# Altium PCB USB_Switch_Board.PcbDoc (part 2 of 2)
Units mm, origin at the board's own origin, x right, y up, seen from the top; angles counter-clockwise.
Board outline 83 x 30 mm, 2 copper layers (Top Layer, Bottom Layer), stack 1.554 mm thick; 73 components, 34 nets, 215 pads, 199 vias.
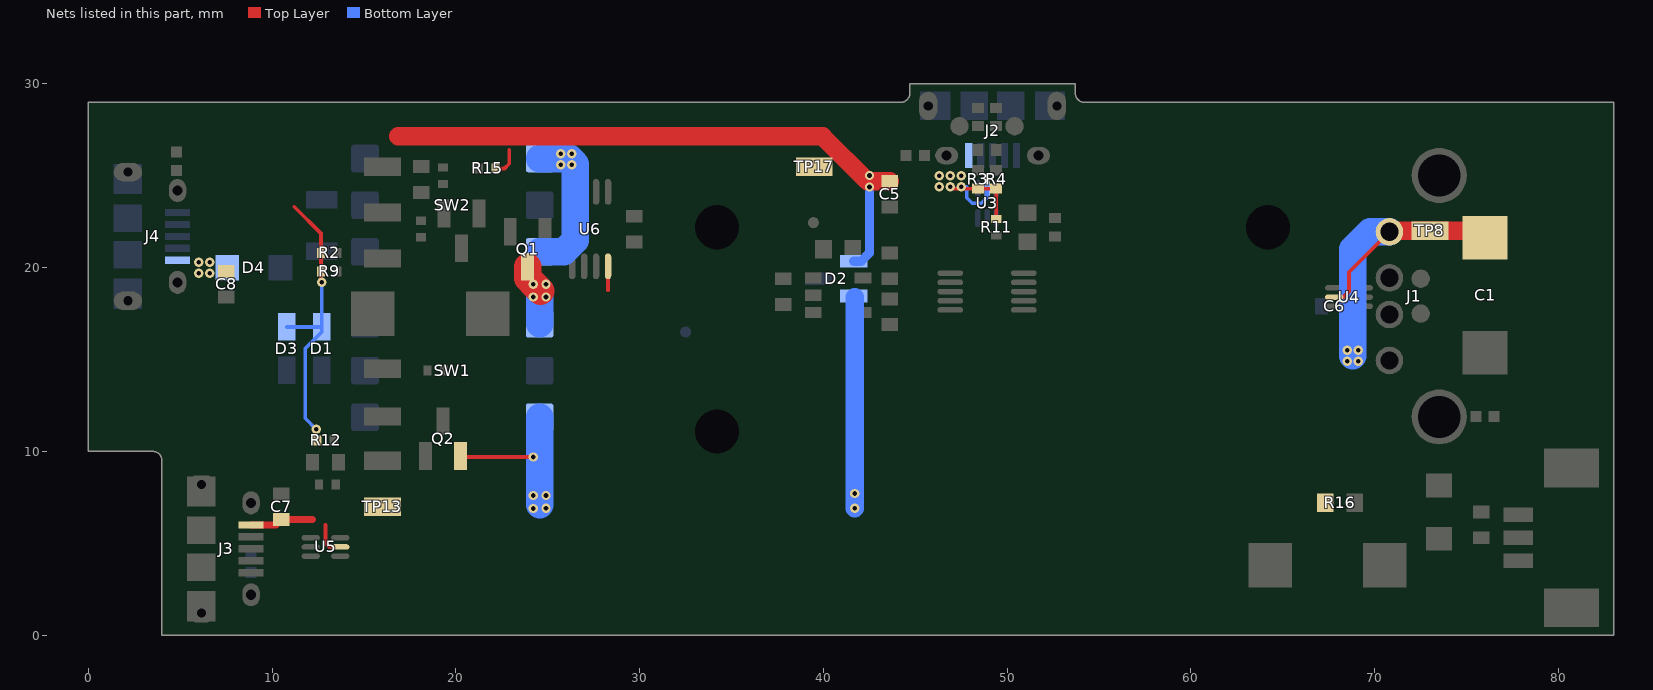
[diagram p2: the nets of this part, all layers, seen from the top]

## Via types
v1: diameter 0.508, hole 0.254, Top Layer to Bottom Layer, tented both sides, 199 vias

## Nets (pads, with @x,y where several pads share a name; then routed paths per layer and width w, separated by ;. In a path a pad name is that pad's centre, name@x,y a point inside that pad or via, vN(x,y) a via of type N, cw(c..) or ccw(c..) an arc to the next point about the centre after c; other vN are vias at no path point) (continued)
V_BUS: C5.1 C8.1 D1.1 D2.1 D3.1 D4.1 J2.1 J4.1 R2.1 R3.2 R4.2 R9.1 R11.2 R12.2 R15.1 SW2.4 SW2.6 TP17.1 U3.5 | length 65.5
  Top Layer w0.2: 11.2,23.315 12.65,21.865 R2.1@12.65,20.8 R9.1@12.65,19.8 12.65,19.1 12.7,19.15 v1(12.7,19.2) ; v1(12.4,11.2) 12.4,10.65 R12.2@12.45,10.6 ; R15.1@22.15,25.4 22.645,25.4 22.9,25.655 22.9,26.4 ; 47.15,24.3 R3.2@48.4,24.3 R4.2@49.4,24.3 R11.2@49.4,22.65
  Top Layer w1: 16.852,27.148 39.952,27.148 42.4,24.7 C5.1@43.6,24.7
  Bottom Layer w0.2: D3.1@10.8,16.775 D1.1@12.7,16.775 ; v1(12.4,11.2) 11.8,11.8 11.8,15.6 12.7,16.5 D1.1@12.7,16.775 ; v1(12.7,19.2) D1.1@12.7,16.775 ; 47.8,24.402 47.8,23.8 48.1,23.5 48.58,23.5 48.9,23.82 U3.5@48.9,24.305
  Bottom Layer w0.5: D2.1@41.65,20.35 42.05,20.35 42.5,20.8 v1(42.5,24.39) v1(42.5,25.013)
  Bottom Layer w1.5: SW2.6@24.55,20.86 25.86,20.86 26.5,21.5 26.5,25.64 26.2,25.94 SW2.4@24.55,25.94
  other v1: 6,19.7 6.6,19.7 6,20.3 6.6,20.3 46.3,24.4 46.9,24.4 47.5,24.4 46.3,25 46.9,25 47.5,25 25.7,25.6 26.3,25.6 25.7,26.2 26.3,26.2
V_IPad: C1.1 C6.1 J1.1 Q1.3 SW1.4 TP8.1 U4.5 U6.8 | length 22.9
  Top Layer w0.2: 28.275,18.788 U6.8@28.275,20.075 ; U4.5@67.795,18.4 68.3,18.4 68.6,18.7 68.6,19.75 J1.1@70.8,21.95
  Top Layer w1: J1.1@70.8,21.95 70.85,22 TP8.1@73,22 C1.1@75.62,22
  Top Layer w1.5: Q1.3@23.9,20.05 23.9,19.43 24.216,19.113 24.6,18.73
  Bottom Layer w1.5: SW1.4@24.55,16.94 24.55,18.79 ; 68.8,15.2 68.8,21 69.75,21.95 J1.1@70.8,21.95
  other v1: 68.5,14.9 69.1,14.9 68.5,15.5 69.1,15.5 24.2,18.4 24.9,18.4 24.2,19.097 24.9,19.097
V_RC_Data: C7.1 D2.2 J3.1 Q2.2 R16.1 SW1.6 TP13.1 U5.5 | length 28.6
  Top Layer w0.2: 12.9,6 12.9,5 13.1,4.8 U5.5@13.705,4.8 ; Q2.2@20.25,9.75 20.3,9.7 v1(24.2,9.7)
  Top Layer w0.4: J3.1@8.85,6 10.2,6 C7.1@10.5,6.3 12.175,6.3
  Bottom Layer w0.2: v1(24.2,9.7) 24.2,12.21 SW1.6@24.55,11.86
  Bottom Layer w0.5: D2.2@41.65,18.45 D2.2@41.7,18.4
  Bottom Layer w1: v1(41.7,6.909) v1(41.7,7.709) D2.2@41.7,18.4
  Bottom Layer w1.5: 24.55,7.1 SW1.6@24.55,11.86
  other v1: 24.2,6.892 24.9,6.909 24.2,7.6 24.9,7.6
pads on no net: F1.1 F2.1 J2.4 J3.4 J4.2 J4.3 J4.4 J5.1 SW1.3 SW1.5 SW2.3 U2.4 U6.3 U6.5

## Polygon pours and split planes (outlines as drawn)
GND on Top Layer "GND_L01_P021" (solid, pour order 21): 0,29 83,29 83,0 0,0
V_RC_Data on Top Layer "V_RC_DATA_L01_P017" (solid, remove dead copper, pour order 17): 12.7,8.3 11.1,6.7 10,6.7 9.5,6.2 9.5,5.8 17.2,5.8 17.6,6.2 67.631,6.2 68.004,6.569 68.004,7.896 67.6,8.3 36.5,8.3 35.7,7.5 32.7,7.5 31.9,8.3
V_IPad on Top Layer "V_IPAD_L01_P013" (solid, remove dead copper, pour order 13): 23.959,19 23.959,16.441 25.45,14.95 35.65,14.95 38.05,12.55 67.15,12.55 69.4,14.8 69.4,15.9 38.6,15.9 36.3,18.2 28.9,18.2 28.4,18.7 28.4,19
V_BUS on Top Layer "V_BUS_L01_P010" (solid, remove dead copper, pour order 10): 5.7,20.915 5.7,19.415 8.215,19.415 15,26.2 24.4,26.2 25.2,25.4 38.6,25.4 40.894,23.106 46.067,23.106 46.067,25.199 43.3,25.202 40.503,28 13.5,28 6.415,20.915
NetC9_1 on Top Layer "NETC9_1_L01_P019" (solid, remove dead copper, pour order 19): 68.4,7.7 68.975,8.275 70.725,8.275 72.6,6.4 74.28,6.4 74.6,6.08 74.6,4.242 72.458,2.1 69.182,2.1 68.4,2.882
GND on Bottom Layer "GND_L02_P023" (solid, pour order 23): 0,29 83,29 83,0 0,0

## Keep-outs
Top Layer:
  circle w0.1: c34.2,11.075 r3.5
  circle w0.1: c34.2,22.2 r3.5
  circle w0.1: c64.2,22.2 r3.5
Bottom Layer:
  circle w0.1: c34.2,11.075 r3.5
  circle w0.1: c34.2,22.2 r3.5
  circle w0.1: c64.2,22.2 r3.5

## Other copper
Top Layer:
  pour cut-out: 61.7,22.2 ccw(c64.2,22.2) 64.2,19.7 ccw(c64.2,22.2) 66.7,22.2 ccw(c64.2,22.2) 64.2,24.7 ccw(c64.2,22.2)
  pour cut-out: 31.7,11.075 ccw(c34.2,11.075) 34.2,8.575 ccw(c34.2,11.075) 36.7,11.075 ccw(c34.2,11.075) 34.2,13.575 ccw(c34.2,11.075)
  pour cut-out: 13.198,7.9 12.798,7.9 12.798,8.5 13.198,8.5
  pour cut-out: 21.5,25.7 21.9,25.7 21.9,25.1 21.5,25.1
  region net NetQ1_2: 22.193,21.607 22.193,24.1 23.693,24.1 23.692,21.493 23.4,21.2 22.6,21.2
  region net USB_Remote_n: 44.8,4.975
  region net V_BUS: 47.7,25 47.7,23.1 45.6,23.1 45.6,25.2 47.5,25.2
  region net NetJ3_0: 9.25,2.4 8.85,2.8 7.65,2.8 7.05,3.4 7.05,6 7.65,6.6 8.85,6.6 9.227,6.977 9.227,7.522 8.05,8.7 5.35,8.7 5.35,0.7 8.05,0.7 9.23,1.88
Bottom Layer:
  region net V_BUS: 4.25,20.6 5.55,20.6 7,20.6 7,19.4 6.049,19.4 5.7,19.75 5.25,20.2 4.25,20.2
  region net GND: 50.3,26.7 50.3,25.4 50.5,25.2 50.5,24.3 50.7,24.1 52.223,24.1 52.4,24.278 52.4,25.1 52.2,25.3 51.1,25.3 50.7,25.7 50.7,26.7
  region net V_BUS: 48.1,26.7 48.1,25.4 47.9,25.2 47.9,24.3 47.7,24.1 46.177,24.1 46,24.278 46,25.1 46.2,25.3 47.3,25.3 47.7,25.7 47.7,26.7
  region net NetJ4_0: 5.25,24 4.85,23.6 3.65,23.6 3.05,23 3.05,20.4 3.65,19.8 4.85,19.8 5.227,19.423 5.227,18.878 4.05,17.7 1.35,17.7 1.35,25.7 4.05,25.7 5.23,24.52
  region net NetJ2_0: 51.5,25.7 51.1,26.1 51.1,27.3 50.5,27.9 47.9,27.9 47.3,27.3 47.3,26.1 46.923,25.723 46.378,25.723 45.2,26.9 45.2,29.6 53.2,29.6 53.2,26.9 52.02,25.72

## Silkscreen, mask and mechanical layers (free items; w line width, h text height)
Top Overlay:
  drawing of 172 lines, arcs and shapes, not listed
  text "VBUS" at 14.6,28.4 h1.5 r180
  text "User USB Port" at 43.6,28.1 h2 r180
  text "Q3.Gate" at 14.6,26 h1.5 r180
  text "VIPAD" at 71.9,24.1 h1.5 r180
  text "SW2.2" at 14.6,24 h1.5 r180
  text "Remote / Power" at 7,23.1 h2 r180
  text "SW2.1" at 14.6,22.5 h1.5 r180
  text "D-" at 73,21 h1.5 r180
  text "iPad" at 82.5,19.8 h2 r180
  text "D+" at 73,16.8 h1.5 r180
  text "SW1.2" at 14.6,14.7 h1.5 r180
  text "SW1.1" at 14.6,13.1 h1.5 r180
  text "Fan" at 82,12 h2 r180
  text "Q2.Gate" at 22.5,8.7 h1.5 r180
  text "QA2:" at 51.1,8.48 h1 r180
  text "QA1:" at 54.1,8.48 h1 r180
  text "VDATA" at 22.1,7.4 h1.5 r180
  text "PCB: '.PCB_Part_Number' - '.PCB_Rev' / PCBA: '.PCBA_Part_Number' -" at 57,6.1 h1.2 r180
  text "Remote / Data" at 18.8,4.6 h2 r180
Bottom Overlay:
  drawing of 165 lines, arcs and shapes, not listed
Top Solder:
  region: 56,29 61,29 61,25 56,25
Bottom Solder:
  region: 56,29 61,29 61,25 56,25
Drill Guide:
  lines w0.1: 3.5,10 cw(c3.5,9.5) 4,9.5 ; 3.5,10 0,10 0,29 44.2,29 ccw(c44.2,29.5) 44.7,29.5 ; 3.5,10 3.5,10 ; 4,9.5 4,9.5 ; 4,9.5 4,0 83,0 83,29 54.2,29 cw(c54.2,29.5) 53.7,29.5 53.7,30 44.7,30 44.7,29.5 ; 44.7,29.5 44.7,29.5
ASSY_DWG_TOP:
  lines w0.1: 3.5,10 cw(c3.5,9.5) 4,9.5 ; 3.5,10 0,10 0,29 44.2,29 ccw(c44.2,29.5) 44.7,29.5 ; 3.5,10 3.5,10 ; 4,9.5 4,9.5 ; 4,9.5 4,0 83,0 83,29 54.2,29 cw(c54.2,29.5) 53.7,29.5 53.7,30 44.7,30 44.7,29.5 ; 44.7,29.5 44.7,29.5
  lines w0.127: -140.156,-14.279 -135.076,-14.279 ; -140.156,39.696 -135.076,39.696 ; -140.156,93.671 -135.076,93.671 ; -70.306,-68.254 -70.306,-63.174 ; -70.306,142.566 -70.306,147.646 ; -0.456,-68.254 -0.456,-63.174 ; -0.456,142.566 -0.456,147.646 ; 19.864,-55.554 134.164,-55.554 ; 19.864,-47.934 134.164,-47.934 ; 19.864,-40.314 57.964,-40.314 ; 57.964,-63.174 57.964,-47.934 57.964,-32.694 ; 69.394,-68.254 69.394,-63.174 ; 69.394,142.566 69.394,147.646 ; 111.304,-63.174 111.304,-47.934 ; 134.164,-14.279 139.244,-14.279 ; 134.164,39.696 139.244,39.696 ; 134.164,93.671 139.244,93.671 ; 19.864,-63.174 19.864,-32.694 ; 19.864,-63.174 134.164,-63.174 ; 19.864,-63.174 -15.696,-63.174 -15.696,-32.694 19.864,-32.694 ; 19.864,-32.694 57.964,-32.694 ; 57.964,-32.694 134.164,-32.694 134.164,-63.174 ; 134.164,-63.174 134.164,142.566 -135.076,142.566 -135.076,-63.174 134.164,-63.174 ; -140.156,-68.254 -140.156,147.646 139.244,147.646 139.244,-68.254 -140.156,-68.254
  text "2" at -35.965,144.217 h1.78
  text "3" at 33.758,144.217 h1.78
  text "4" at 103.633,144.217 h1.78
  text "A" at 136.069,118.36 h1.78
  text "ASSEMBLY NOTES: / 1. PCBA MANUFACTURER TO CONFORM TO  /    IPC-A-610 CLASS II WORKMANSHIP / 2. ALL PROCESS SHALL BE COMPLIANT TO ROHS STANDARD / 3. ASSEMBLED PCBA SHALL BE WASHED / 4. PCBA MANUFACTURER SHALL PERFORM AOI AND /     5DX ON 100% OF THE ASSEMBLED BOARDS. / 5.  PCBA MANUFACTURER TO APPLY REVISION NUMBER  /    ON WHITE SILKSCREEN BLOCK / 6. PCBA MANUFACTURER TO REMOVE ANY EXCESS MATERIAL /    FROM PANELIZATION OUTSIDE OF PCB OUTLINE" at -133.4,113.875 h3
  text "B" at -138.251,64.385 h1.78
  text "B" at 136.069,64.385 h1.78
  text "C" at -138.251,10.41 h1.78
  text "C" at 136.069,10.41 h1.78
  text "ENGINEER:" at 21.134,-35.234 h1.14
  text "TITLE:" at 59.234,-35.234 h1.14
  text ".PCB_Drawn_By" at 24.944,-40.314 h1.78
  text "PCB DESIGNER:" at 21.134,-42.727 h1.14
  text "'.PCBA_Title' / Assembly Top" at 65.584,-42.854 h1.78
  text "D" at -138.251,-43.438 h1.78
  text "D" at 136.069,-43.438 h1.78
  text ".PCB_Drawn_By" at 24.944,-47.934 h1.78
  text "DATE:" at 21.134,-50.474 h1.14
  text "PART NO.:" at 59.234,-50.474 h1.14
  text "REV:" at 112.574,-50.474 h1.14
  text ".PCB_Rev" at 121.972,-52.76 h2.54
  text ".PRINT_DATE" at 22.404,-53.522 h1.78
  text ".PCBA_Part_Number" at 65.104,-53.722 h1.78
  text "'.Company' / '.Address1' / '.Address2'" at -13.156,-58.094 h1.78
  text "FILE NAME:" at 21.134,-58.094 h1.14
  text "DWG NO:" at 59.234,-58.094 h1.14
  text "SCALE:" at 112.574,-58.094 h1.14
  text "1:1" at 121.972,-60.38 h2.54
  text ".PCB_FILE_NAME_NO_PATH" at 22.404,-61.142 h1.78
  text "1" at -105.832,-66.603 h1.78
  text "2" at -35.965,-66.603 h1.78
  text "3" at 33.758,-66.603 h1.78
  text "4" at 103.633,-66.603 h1.78
ASSY_DWG_BOT:
  lines w0.1: 3.5,10 cw(c3.5,9.5) 4,9.5 ; 3.5,10 0,10 0,29 44.2,29 ccw(c44.2,29.5) 44.7,29.5 ; 3.5,10 3.5,10 ; 4,9.5 4,9.5 ; 4,9.5 4,0 83,0 83,29 54.2,29 cw(c54.2,29.5) 53.7,29.5 53.7,30 44.7,30 44.7,29.5 ; 44.7,29.5 44.7,29.5
  lines w0.127: -140.156,-14.279 -135.076,-14.279 ; -140.156,39.696 -135.076,39.696 ; -140.156,93.671 -135.076,93.671 ; -70.306,-68.254 -70.306,-63.174 ; -70.306,142.566 -70.306,147.646 ; -0.456,-68.254 -0.456,-63.174 ; -0.456,142.566 -0.456,147.646 ; 19.864,-55.554 134.164,-55.554 ; 19.864,-47.934 134.164,-47.934 ; 19.864,-40.314 57.964,-40.314 ; 57.964,-63.174 57.964,-47.934 57.964,-32.694 ; 69.394,-68.254 69.394,-63.174 ; 69.394,142.566 69.394,147.646 ; 111.304,-63.174 111.304,-47.934 ; 134.164,-14.279 139.244,-14.279 ; 134.164,39.696 139.244,39.696 ; 134.164,93.671 139.244,93.671 ; 19.864,-63.174 19.864,-32.694 ; 19.864,-63.174 134.164,-63.174 ; 19.864,-63.174 -15.696,-63.174 -15.696,-32.694 19.864,-32.694 ; 19.864,-32.694 57.964,-32.694 ; 57.964,-32.694 134.164,-32.694 134.164,-63.174 ; 134.164,-63.174 134.164,142.566 -135.076,142.566 -135.076,-63.174 134.164,-63.174 ; -140.156,-68.254 -140.156,147.646 139.244,147.646 139.244,-68.254 -140.156,-68.254
  text "2" at -35.965,144.217 h1.78
  text "3" at 33.758,144.217 h1.78
  text "4" at 103.633,144.217 h1.78
  text "A" at 136.069,118.36 h1.78
  text "B" at -138.251,64.385 h1.78
  text "B" at 136.069,64.385 h1.78
  text "C" at -138.251,10.41 h1.78
  text "C" at 136.069,10.41 h1.78
  text "ENGINEER:" at 21.134,-35.234 h1.14
  text "TITLE:" at 59.234,-35.234 h1.14
  text ".PCB_Drawn_By" at 24.944,-40.314 h1.78
  text "PCB DESIGNER:" at 21.134,-42.727 h1.14
  text "'.PCBA_Title' / Assembly Bottom" at 65.584,-42.854 h1.78
  text "D" at -138.251,-43.438 h1.78
  text "D" at 136.069,-43.438 h1.78
  text ".PCB_Drawn_By" at 24.944,-47.934 h1.78
  text "DATE:" at 21.134,-50.474 h1.14
  text "PART NO.:" at 59.234,-50.474 h1.14
  text "REV:" at 112.574,-50.474 h1.14
  text ".PCB_Rev" at 121.972,-52.76 h2.54
  text ".PRINT_DATE" at 22.404,-53.522 h1.78
  text ".PCBA_Part_Number" at 65.104,-53.722 h1.78
  text "'.Company' / '.Address1' / '.Address2'" at -13.156,-58.094 h1.78
  text "FILE NAME:" at 21.134,-58.094 h1.14
  text "DWG NO:" at 59.234,-58.094 h1.14
  text "SCALE:" at 112.574,-58.094 h1.14
  text "1:1" at 121.972,-60.38 h2.54
  text ".PCB_FILE_NAME_NO_PATH" at 22.404,-61.142 h1.78
  text "1" at -105.832,-66.603 h1.78
  text "2" at -35.965,-66.603 h1.78
  text "3" at 33.758,-66.603 h1.78
  text "4" at 103.633,-66.603 h1.78
CONF_TOP:
  lines w0.1: 3.5,10 cw(c3.5,9.5) 4,9.5 ; 3.5,10 0,10 0,29 44.2,29 ccw(c44.2,29.5) 44.7,29.5 ; 3.5,10 3.5,10 ; 4,9.5 4,9.5 ; 4,9.5 4,0 83,0 83,29 54.2,29 cw(c54.2,29.5) 53.7,29.5 53.7,30 44.7,30 44.7,29.5 ; 44.7,29.5 44.7,29.5
  lines w0.127: -140.156,-14.279 -135.076,-14.279 ; -140.156,39.696 -135.076,39.696 ; -140.156,93.671 -135.076,93.671 ; -70.306,-68.254 -70.306,-63.174 ; -70.306,142.566 -70.306,147.646 ; -0.456,-68.254 -0.456,-63.174 ; -0.456,142.566 -0.456,147.646 ; 19.864,-55.554 134.164,-55.554 ; 19.864,-47.934 134.164,-47.934 ; 19.864,-40.314 57.964,-40.314 ; 57.964,-63.174 57.964,-47.934 57.964,-32.694 ; 69.394,-68.254 69.394,-63.174 ; 69.394,142.566 69.394,147.646 ; 111.304,-63.174 111.304,-47.934 ; 134.164,-14.279 139.244,-14.279 ; 134.164,39.696 139.244,39.696 ; 134.164,93.671 139.244,93.671 ; 19.864,-63.174 19.864,-32.694 ; 19.864,-63.174 134.164,-63.174 ; 19.864,-63.174 -15.696,-63.174 -15.696,-32.694 19.864,-32.694 ; 19.864,-32.694 57.964,-32.694 ; 57.964,-32.694 134.164,-32.694 134.164,-63.174 ; 134.164,-63.174 134.164,142.566 -135.076,142.566 -135.076,-63.174 134.164,-63.174 ; -140.156,-68.254 -140.156,147.646 139.244,147.646 139.244,-68.254 -140.156,-68.254
  text "2" at -35.965,144.217 h1.78
  text "3" at 33.758,144.217 h1.78
  text "4" at 103.633,144.217 h1.78
  text "CONFORMAL COATING APPLICATION NOTES: / 1. PCBA MANUFACTURER TO APPLY CONFORMAL COATING THROUGHOUT /    THE ENTIRE AREA WITHIN THE BOARD OUTLINE EXCEPT FOR THE /    SHADED REGION MARKED ON THIS DRAWING. / 2. MANUFACTURER TO PROVIDE CONFORMAL COATING MATERIAL /    FOR APPROVAL. / 3. WASHING IS ALLOWED PRIOR TO THE APPLICATION OF /    CONFORMAL COATING" at -133.477,122.047 h3
  text "A" at 136.069,118.36 h1.78
  text "B" at -138.251,64.385 h1.78
  text "B" at 136.069,64.385 h1.78
  text "C" at -138.251,10.41 h1.78
  text "C" at 136.069,10.41 h1.78
  text "ENGINEER:" at 21.134,-35.234 h1.14
  text "TITLE:" at 59.234,-35.234 h1.14
  text ".PCB_Drawn_By" at 24.944,-40.314 h1.78
  text "PCB DESIGNER:" at 21.134,-42.727 h1.14
  text "'.PCBA_Title' / Top Layer Conformal Coating Mask" at 65.584,-42.854 h1.78
  text "D" at -138.251,-43.438 h1.78
  text "D" at 136.069,-43.438 h1.78
  text ".PCB_Drawn_By" at 24.944,-47.934 h1.78
  text "DATE:" at 21.134,-50.474 h1.14
  text "PART NO.:" at 59.234,-50.474 h1.14
  text "REV:" at 112.574,-50.474 h1.14
  text ".PCB_Rev" at 121.972,-52.76 h2.54
  text ".PRINT_DATE" at 22.404,-53.522 h1.78
  text ".PCBA_Part_Number" at 65.104,-53.722 h1.78
  text "'.Company' / '.Address1' / '.Address2'" at -13.156,-58.094 h1.78
  text "FILE NAME:" at 21.134,-58.094 h1.14
  text "DWG NO:" at 59.234,-58.094 h1.14
  text "SCALE:" at 112.574,-58.094 h1.14
  text "1:1" at 121.972,-60.38 h2.54
  text ".PCB_FILE_NAME_NO_PATH" at 22.404,-61.142 h1.78
  text "1" at -105.832,-66.603 h1.78
  text "2" at -35.965,-66.603 h1.78
  text "3" at 33.758,-66.603 h1.78
  text "4" at 103.633,-66.603 h1.78
CONF_BOT:
  lines w0.1: 3.5,10 cw(c3.5,9.5) 4,9.5 ; 3.5,10 0,10 0,29 44.2,29 ccw(c44.2,29.5) 44.7,29.5 ; 3.5,10 3.5,10 ; 4,9.5 4,9.5 ; 4,9.5 4,0 83,0 83,29 54.2,29 cw(c54.2,29.5) 53.7,29.5 53.7,30 44.7,30 44.7,29.5 ; 44.7,29.5 44.7,29.5
  lines w0.127: -140.156,-14.279 -135.076,-14.279 ; -140.156,39.696 -135.076,39.696 ; -140.156,93.671 -135.076,93.671 ; -70.306,-68.254 -70.306,-63.174 ; -70.306,142.566 -70.306,147.646 ; -0.456,-68.254 -0.456,-63.174 ; -0.456,142.566 -0.456,147.646 ; 19.864,-55.554 134.164,-55.554 ; 19.864,-47.934 134.164,-47.934 ; 19.864,-40.314 57.964,-40.314 ; 57.964,-63.174 57.964,-47.934 57.964,-32.694 ; 69.394,-68.254 69.394,-63.174 ; 69.394,142.566 69.394,147.646 ; 111.304,-63.174 111.304,-47.934 ; 134.164,-14.279 139.244,-14.279 ; 134.164,39.696 139.244,39.696 ; 134.164,93.671 139.244,93.671 ; 19.864,-63.174 19.864,-32.694 ; 19.864,-63.174 134.164,-63.174 ; 19.864,-63.174 -15.696,-63.174 -15.696,-32.694 19.864,-32.694 ; 19.864,-32.694 57.964,-32.694 ; 57.964,-32.694 134.164,-32.694 134.164,-63.174 ; 134.164,-63.174 134.164,142.566 -135.076,142.566 -135.076,-63.174 134.164,-63.174 ; -140.156,-68.254 -140.156,147.646 139.244,147.646 139.244,-68.254 -140.156,-68.254
  text "2" at -35.965,144.217 h1.78
  text "3" at 33.758,144.217 h1.78
  text "4" at 103.633,144.217 h1.78
  text "A" at 136.069,118.36 h1.78
  text "B" at -138.251,64.385 h1.78
  text "B" at 136.069,64.385 h1.78
  text "C" at -138.251,10.41 h1.78
  text "C" at 136.069,10.41 h1.78
  text "ENGINEER:" at 21.134,-35.234 h1.14
  text "TITLE:" at 59.234,-35.234 h1.14
  text ".PCB_Drawn_By" at 24.944,-40.314 h1.78
  text "PCB DESIGNER:" at 21.134,-42.727 h1.14
  text "'.PCBA_Title' / Bottom Layer Conformal Coating Mask" at 65.584,-42.854 h1.78
  text "D" at -138.251,-43.438 h1.78
  text "D" at 136.069,-43.438 h1.78
  text ".PCB_Drawn_By" at 24.944,-47.934 h1.78
  text "DATE:" at 21.134,-50.474 h1.14
  text "PART NO.:" at 59.234,-50.474 h1.14
  text "REV:" at 112.574,-50.474 h1.14
  text ".PCB_Rev" at 121.972,-52.76 h2.54
  text ".PRINT_DATE" at 22.404,-53.522 h1.78
  text ".PCBA_Part_Number" at 65.104,-53.722 h1.78
  text "'.Company' / '.Address1' / '.Address2'" at -13.156,-58.094 h1.78
  text "FILE NAME:" at 21.134,-58.094 h1.14
  text "DWG NO:" at 59.234,-58.094 h1.14
  text "SCALE:" at 112.574,-58.094 h1.14
  text "1:1" at 121.972,-60.38 h2.54
  text ".PCB_FILE_NAME_NO_PATH" at 22.404,-61.142 h1.78
  text "1" at -105.832,-66.603 h1.78
  text "2" at -35.965,-66.603 h1.78
  text "3" at 33.758,-66.603 h1.78
  text "4" at 103.633,-66.603 h1.78
Mechanical 13:
  lines w0.1: 3.5,10 cw(c3.5,9.5) 4,9.5 ; 3.5,10 0,10 0,29 44.2,29 ccw(c44.2,29.5) 44.7,29.5 ; 3.5,10 3.5,10 ; 4,9.5 4,9.5 ; 4,9.5 4,0 83,0 83,29 54.2,29 cw(c54.2,29.5) 53.7,29.5 53.7,30 44.7,30 44.7,29.5 ; 44.7,29.5 44.7,29.5
Mechanical 14:
  lines w0.1: 3.5,10 cw(c3.5,9.5) 4,9.5 ; 3.5,10 0,10 0,29 44.2,29 ccw(c44.2,29.5) 44.7,29.5 ; 3.5,10 3.5,10 ; 4,9.5 4,9.5 ; 4,9.5 4,0 83,0 83,29 54.2,29 cw(c54.2,29.5) 53.7,29.5 53.7,30 44.7,30 44.7,29.5 ; 44.7,29.5 44.7,29.5
Mechanical 15:
  lines w0.1: 3.5,10 cw(c3.5,9.5) 4,9.5 ; 3.5,10 0,10 0,29 44.2,29 ccw(c44.2,29.5) 44.7,29.5 ; 3.5,10 3.5,10 ; 4,9.5 4,9.5 ; 4,9.5 4,0 83,0 83,29 54.2,29 cw(c54.2,29.5) 53.7,29.5 53.7,30 44.7,30 44.7,29.5 ; 44.7,29.5 44.7,29.5
Mechanical 16:
  lines w0.1: 3.5,10 cw(c3.5,9.5) 4,9.5 ; 3.5,10 0,10 0,29 44.2,29 ccw(c44.2,29.5) 44.7,29.5 ; 3.5,10 3.5,10 ; 4,9.5 4,9.5 ; 4,9.5 4,0 83,0 83,29 54.2,29 cw(c54.2,29.5) 53.7,29.5 53.7,30 44.7,30 44.7,29.5 ; 44.7,29.5 44.7,29.5
Drill Drawing:
  drawing of 245 lines, arcs and shapes, not listed
  text "2" at -35.965,144.217 h1.78
  text "3" at 33.758,144.217 h1.78
  text "4" at 103.633,144.217 h1.78
  text "A" at 136.069,118.36 h1.78
  text "FABRICATION NOTES: / 1. MANUFACTURE TO IPC-A-600 CLASS 2 STANDARD / 2. BOARD SPECIFICATIONS /    LAYERS:                '.PCB_Layer_Count' /    STACKUP:               '.PCB_Stackup' /    MATERIAL:              '.PCB_Material' /    FINAL THICKNESS:       '.PCB_Thickness' /    FINISH PLATING:        '.PCB_Finish_Plating' /    OUTER LAYER Cu. WEIGHT:'.PCB_Copper_Weight_Outer' /    INNER LAYER Cu. WEIGHT:'.PCB_Copper_Weight_Inner' /    MASK TYPE:             '.PCB_Mask_Type' /    MASK COLOR:            '.PCB_Mask_Color' /    SILKSCREEN TOP:        '.PCB_Silk_Top' /    SILKSCREEN BOTTOM:     '.PCB_Silk_Bottom' /    IMPEDANCE CTRL:        '.PCB_Impedance_controlled' /    MINIMUM TRACE WIDTH:   '.PCB_Min_Trace_Width' /    MINIMUM SPACE:         '.PCB_Min_Space_Width' /  / 3. ELECTRICAL TEST REQUIRED. / 4. NO SILKSCREEN SHALL BE APPLIED TO BARE COPPER.  /    PCB MANUFACTURER MAY CLIP SILKSCREEN WHERE NECESSARY. / 5. ANY MODIFICATIONS TO THE ARTWORK OR DEVIATION /    FROM THIS DRAWING MUST BE APPROVED BY KESPRY INC." at -133.858,69.469 h3
  text "B" at -138.251,64.385 h1.78
  text "B" at 136.069,64.385 h1.78
  text "Layer" at -126.648,62.865 h1.52
  text "Name" at -120.27,62.865 h1.52
  text "Material" at -107.939,62.865 h1.52
  text "Thickness" at -96.857,62.865 h1.52
  text "Constant" at -87.755,62.865 h1.52
  text "Board Layer Stack" at -79.329,62.865 h1.52
  text "1" at -126.648,59.817 h1.52
  text "Top Overlay" at -120.27,59.817 h1.52
  text "2" at -126.648,56.769 h1.52
  text "Top Solder" at -120.27,56.769 h1.52
  text "Solder Resist" at -107.939,56.769 h1.52
  text "0.40mil" at -96.857,56.769 h1.52
  text "3.5" at -87.755,56.769 h1.52
  text "3" at -126.648,53.721 h1.52
  text "Top Layer" at -120.27,53.721 h1.52
  text "Copper" at -107.939,53.721 h1.52
  text "1.40mil" at -96.857,53.721 h1.52
  text "4" at -126.648,50.673 h1.52
  text "Dielectric 1" at -120.27,50.673 h1.52
  text "FR-4" at -107.939,50.673 h1.52
  text "58.40mil" at -96.857,50.673 h1.52
  text "4.8" at -87.755,50.673 h1.52
  text "5" at -126.648,47.625 h1.52
  text "Bottom Layer" at -120.27,47.625 h1.52
  text "Copper" at -107.939,47.625 h1.52
  text "1.40mil" at -96.857,47.625 h1.52
  text "6" at -126.648,44.577 h1.52
  text "Bottom Solder" at -120.27,44.577 h1.52
  text "Solder Resist" at -107.939,44.577 h1.52
  text "0.40mil" at -96.857,44.577 h1.52
  text "3.5" at -87.755,44.577 h1.52
  text "7" at -126.648,41.529 h1.52
  text "Bottom Overlay" at -120.27,41.529 h1.52
  text "Symbol" at -126.4,37.785 h1.51
  text "Count" at -120.475,37.785 h1.51
  text "Hole Size" at -114.322,37.785 h1.51
  text "Plated" at -102.807,37.785 h1.51
  text "Hole Type" at -97.605,37.785 h1.51
  text "Drill Layer Pair" at -90.033,37.785 h1.51
  text "Via/Pad" at -75.698,37.785 h1.51
  text "Pad Shape" at -69.492,37.785 h1.51
  text "Hole Tolerance (+)" at -61.386,37.785 h1.51
  text "Hole Tolerance (-)" at -48.727,37.785 h1.51
  text "2" at -120.475,35.174 h1.26
  text "2.300mm (90.55mil)" at -114.322,35.174 h1.26
  text "PTH" at -102.807,35.174 h1.26
  text "Round" at -97.605,35.174 h1.26
  text "Top Layer - Bottom Layer" at -90.033,35.174 h1.26
  text "Pad" at -75.698,35.174 h1.26
  text "Rounded" at -69.492,35.174 h1.26
  text "3" at -120.475,32.564 h1.26
  text "2.400mm (94.49mil)" at -114.322,32.564 h1.26
  text "NPTH" at -102.807,32.564 h1.26
  text "Round" at -97.605,32.564 h1.26
  text "Top Layer - Bottom Layer" at -90.033,32.564 h1.26
  text "Pad" at -75.698,32.564 h1.26
  text "Rounded" at -69.492,32.564 h1.26
  text "4" at -120.475,29.953 h1.26
  text "1.000mm (39.37mil)" at -114.322,29.953 h1.26
  text "PTH" at -102.807,29.953 h1.26
  text "Round" at -97.605,29.953 h1.26
  text "Top Layer - Bottom Layer" at -90.033,29.953 h1.26
  text "Pad" at -75.698,29.953 h1.26
  text "Rounded" at -69.492,29.953 h1.26
  text "6" at -120.475,27.342 h1.26
  text "0.500mm (19.69mil)" at -114.322,27.342 h1.26
  text "PTH" at -102.807,27.342 h1.26
  text "Slot" at -97.605,27.342 h1.26
  text "Top Layer - Bottom Layer" at -90.033,27.342 h1.26
  text "Pad" at -75.698,27.342 h1.26
  text "Rounded" at -69.492,27.342 h1.26
  text "6" at -120.475,24.732 h1.26
  text "0.550mm (21.65mil)" at -114.322,24.732 h1.26
  text "PTH" at -102.807,24.732 h1.26
  text "Slot" at -97.605,24.732 h1.26
  text "Top Layer - Bottom Layer" at -90.033,24.732 h1.26
  text "Pad" at -75.698,24.732 h1.26
  text "Rounded" at -69.492,24.732 h1.26
  text "199" at -120.475,22.121 h1.26
  text "0.254mm (10.00mil)" at -114.322,22.121 h1.26
  text "PTH" at -102.807,22.121 h1.26
  text "Round" at -97.605,22.121 h1.26
  text "Top Layer - Bottom Layer" at -90.033,22.121 h1.26
  text "Via" at -75.698,22.121 h1.26
  text "Rounded" at -69.492,22.121 h1.26
  text "220 Total" at -120.475,19.511 h1.26
  text "Slot definitions :" at -126.4,17.683 h1.26
  text "Routed Path Length" at -117.809,17.683 h1.26
  text "= Calculated from tool start centre position to tool end centre position." at -107.165,17.683 h1.26
  text "Hole Length" at -117.809,16.639 h1.26
  text "= Routed Path Length + Tool Size = Slot length as defined in the PCB layout" at -111.116,16.639 h1.26
  text "C" at -138.251,10.41 h1.78
  text "C" at 136.069,10.41 h1.78
  text "ENGINEER:" at 21.134,-35.234 h1.14
  text "TITLE:" at 59.234,-35.234 h1.14
  text ".PCB_Drawn_By" at 24.944,-40.314 h1.78
  text "PCB DESIGNER:" at 21.134,-42.727 h1.14
  text "'.PCB_Title'" at 65.584,-42.854 h1.78
  text "D" at -138.251,-43.438 h1.78
  text "D" at 136.069,-43.438 h1.78
  text ".PCB_Drawn_By" at 24.944,-47.934 h1.78
  text "DATE:" at 21.134,-50.474 h1.14
  text "PART NO.:" at 59.234,-50.474 h1.14
  text "REV:" at 112.574,-50.474 h1.14
  text ".PCB_Rev" at 121.972,-52.76 h2.54
  text ".PRINT_DATE" at 22.404,-53.522 h1.78
  text ".PCB_Part_Number" at 65.104,-53.722 h1.78
  text "'.Company' / '.Address1' / '.Address2'" at -13.156,-58.094 h1.78
  text "FILE NAME:" at 21.134,-58.094 h1.14
  text "DWG NO:" at 59.234,-58.094 h1.14
  text "SCALE:" at 112.574,-58.094 h1.14
  text "1:1" at 121.972,-60.38 h2.54
  text ".PCB_FILE_NAME_NO_PATH" at 22.404,-61.142 h1.78
  text "1" at -105.832,-66.603 h1.78
  text "2" at -35.965,-66.603 h1.78
  text "3" at 33.758,-66.603 h1.78
  text "4" at 103.633,-66.603 h1.78